# Altium PCB PWMSignalSplitter.PcbDoc
Units mil, origin at the board's own origin, x right, y up, seen from the top; angles counter-clockwise.
Board outline 1062.2 x 740 mil, 2 copper layers (Top Layer, Bottom Layer); 3 components, 3 nets, 7 pads, 0 vias.
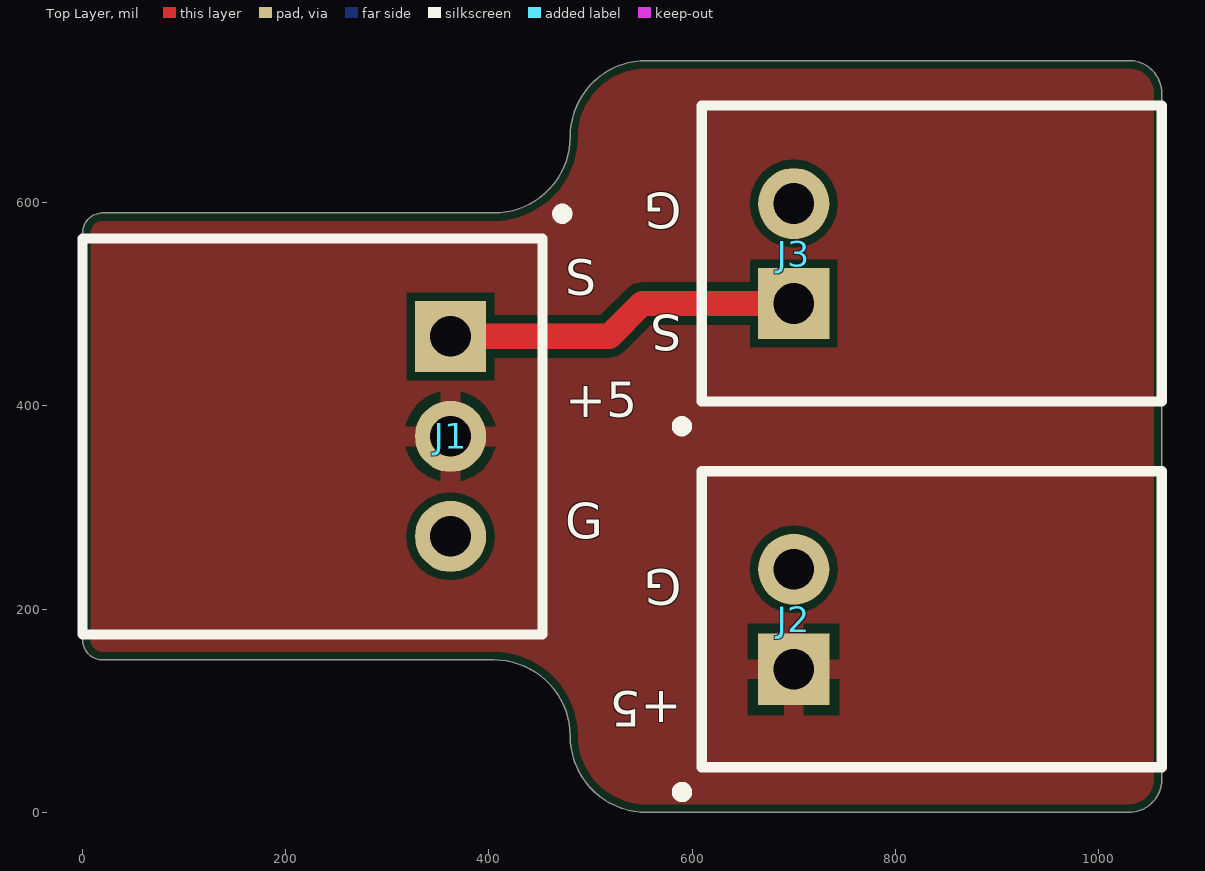
[diagram p0: Top Layer view]
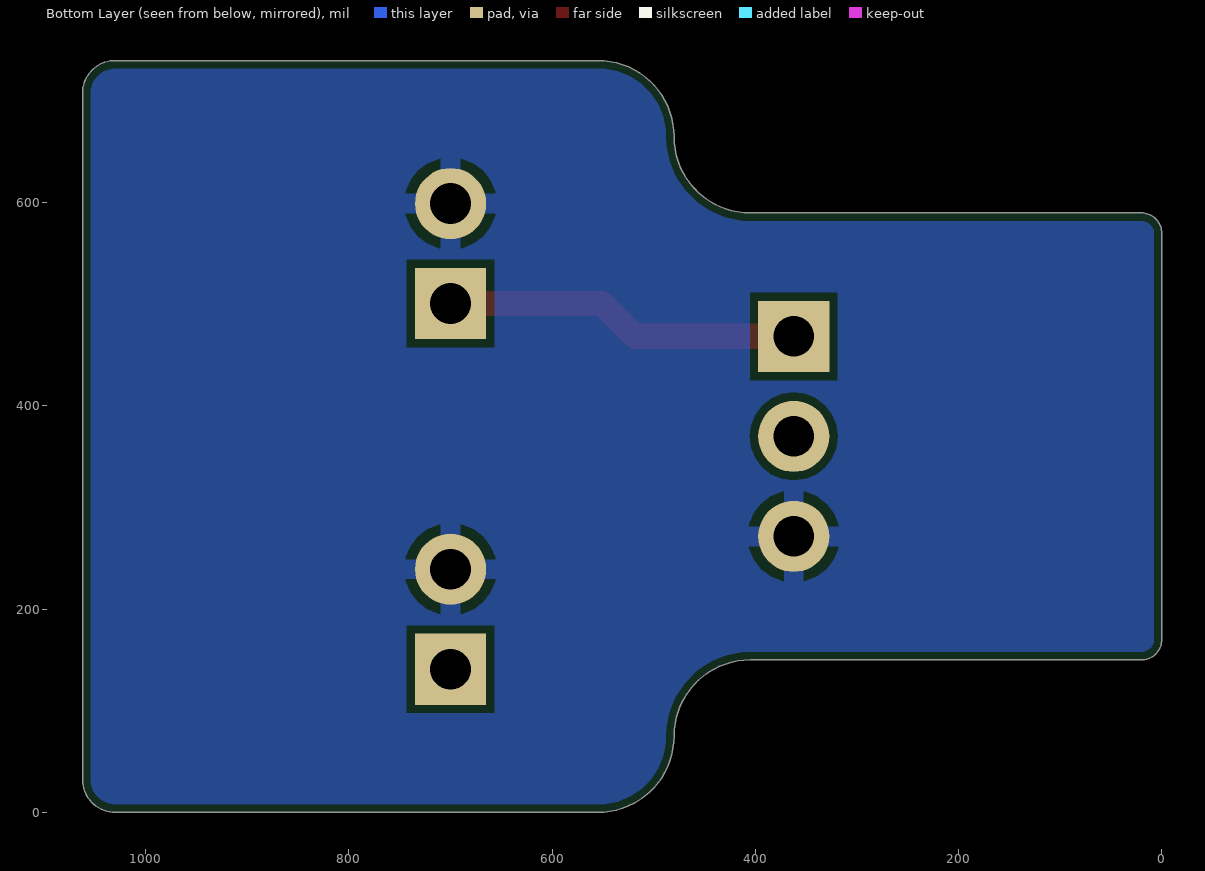
[diagram p1: Bottom Layer view, seen from below]
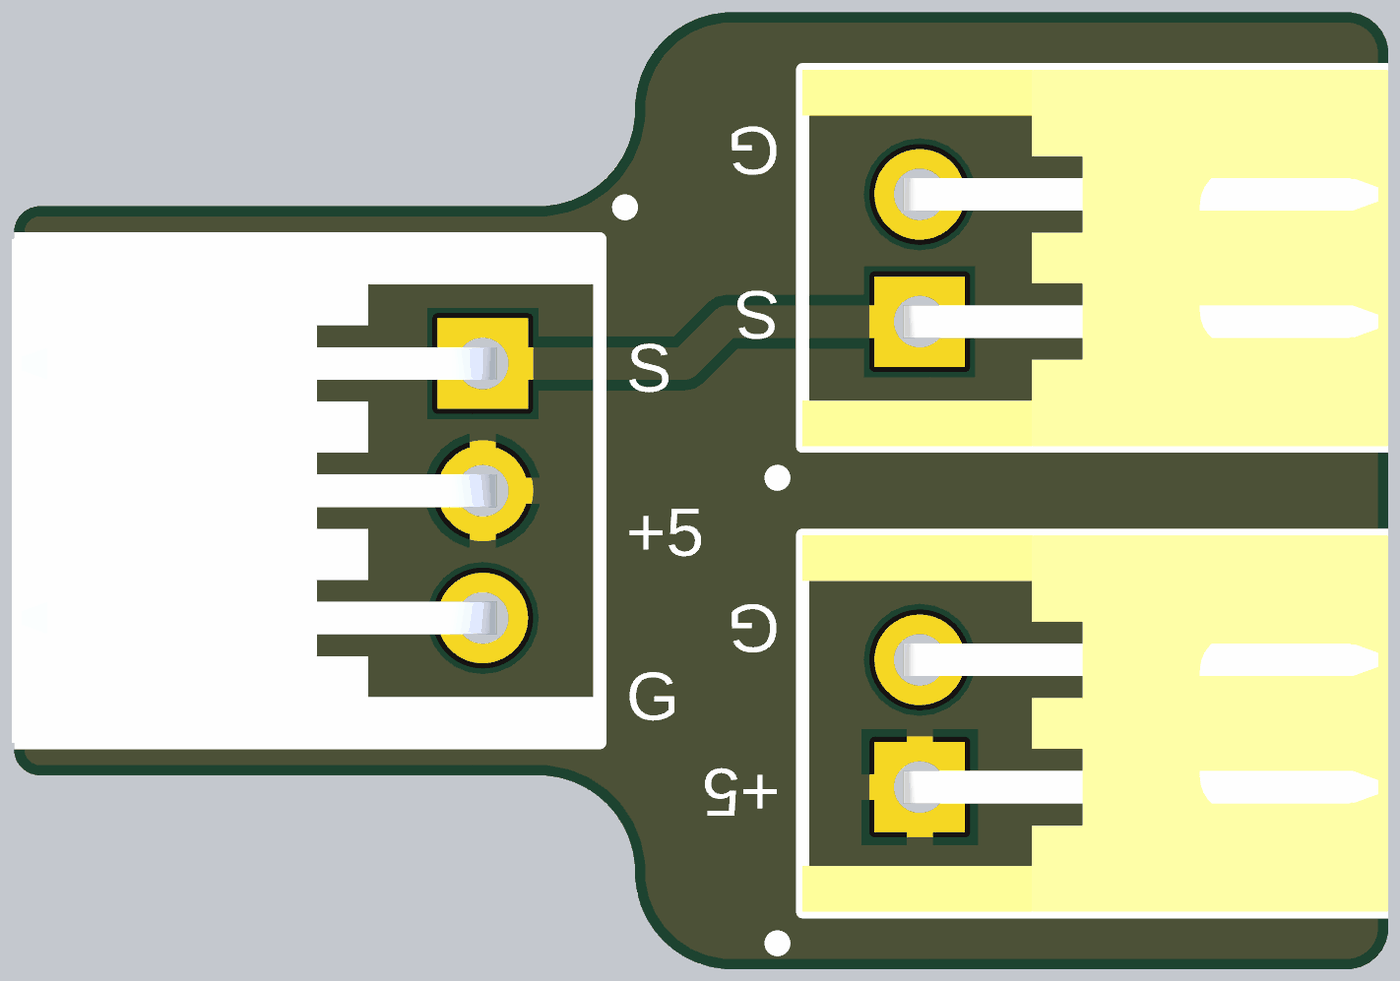
[diagram p2: 3D render of the assembled board from above, using the file's embedded part models]

## Layer stack, top to bottom
Top Solder: solder mask 0.4, Solder Resist, Dk 3.5
Top Layer: signal copper 1.4
Dielectric 1: dielectric 12.6, FR-4, Dk 4.8
Bottom Layer: signal copper 1.4
Bottom Solder: solder mask 0.4, Solder Resist, Dk 3.5

## Board outline
0,170 ccw(c20,170) 20,150 405,150 cw(c405,75) 480,75 ccw(c555,75) 555,0 1030,0 ccw(c1030,32.2) 1062.2,32.2 1062.2,707.8 ccw(c1030,707.8) 1030,740 555,740 ccw(c555,665) 480,665 cw(c405,665) 405,590 20,590 ccw(c20,570) 0,570

## Design rules (kind name [scope] priority, off if disabled: settings)
BoardOutlineClearance [All] p1: gap=7.87 ignorepadtopadclearanceinfootprint=FALSE except(15.75: Arc-SplitBarrior Arc-SplitContinuation Track-SplitBarrior Track-SplitContinuation SMDPad-SplitBarrior SMDPad-SplitContinuation THPad-SplitBarrior THPad-SplitContinuation Via-SplitBarrior Via-SplitContinuation Fill-SplitBarrior Fill-SplitContinuation Poly-SplitBarrior Poly-SplitContinuation Region-SplitBarrior Region-SplitContinuation Text-SplitBarrior Text-SplitContinuation)
Clearance "Clearance Bottom Layer" [OnLayer('Bottom Layer')] p1: gap=8 ignorepadtopadclearanceinfootprint=TRUE except(10: Arc-Text Track-Text SMDPad-Text THPad-Text Via-Text Fill-Text Poly-Text Region-Text Text-Text)
Clearance "Clearance Top Layer" [OnLayer('Top Layer')] p2: gap=8 ignorepadtopadclearanceinfootprint=TRUE except(10: Arc-Text Track-Text SMDPad-Text THPad-Text Via-Text Fill-Text Poly-Text Region-Text Text-Text)
Clearance [All] p3: gap=7.87 ignorepadtopadclearanceinfootprint=FALSE except(3.5: Arc-Arc Arc-Track Arc-SMDPad Track-Track Track-SMDPad SMDPad-SMDPad; 5: Arc-Via Track-Via SMDPad-Via THPad-Via Via-Via; 10: Arc-Text Track-Text SMDPad-Text THPad-Text Via-Text Fill-Text Poly-Text Region-Text Text-Text)
HoleSize [All] p1: absolutevalues=TRUE maxlimit=248.03 minlimit=7.87 maxpercent=80.000 minpercent=20.000
MinimumAnnularRing [All] p1: minimumring=3
MinimumSolderMaskSliver [All] p1: minsoldermaskwidth=3.94
PolygonConnect PolygonConnect_1 [All] p1: thpad.connectstyle=Relief thpad.reliefconductorwidth=20 thpad.reliefentries=4 thpad.polygonreliefangle="90 Angle" thpad.airgapwidth=10 smdpad.connectstyle=Relief smdpad.reliefconductorwidth=20 smdpad.reliefentries=4 smdpad.polygonreliefangle="90 Angle" smdpad.airgapwidth=10 via.connectstyle=Direct via.reliefconductorwidth=20 via.reliefentries=4 via.polygonreliefangle="90 Angle" via.airgapwidth=10
PolygonConnect [All] p2: connectstyle=Relief reliefconductorwidth=10 reliefentries=4 polygonreliefangle="90 Angle" airgapwidth=10
RoutingCorners [All] p1: cornerstyle=Round minsetback=100 maxsetback=100
RoutingVias [All] p1: holewidth=19.68 width=39.37 viastyle="Through Hole" minholewidth=7.87 minwidth=17.72 maxholewidth=39.37 maxwidth=78.74
SilkToSilkClearance [All] p1: silktosilkclearance=3.94
SilkToSolderMaskClearance [IsPad] p1: minsilkscreentomaskgap=3.94 clearancetoexposedcopper=TRUE
SolderMaskExpansion [All] p1: expansion=4 istentingtop=FALSE
Width [All] p1: maxlimit=100 minlimit=3.5 preferedwidth=15
24 further rules are at their usual default settings.

## Components (designator, comment, footprint, x,y, rotation, side; value= is the part's Value field where it differs from the comment)
J1 "JST-XH 3POS R/A" S3B-XH-A(LF)(SN) 362.2,370 r90 top
J2 "JST-XH 2POS R/A" S2B-XH-A(LF)(SN) 700,190 r270 top
J3 "JST-XH 2POS R/A" S2B-XH-A(LF)(SN) 700,550 r270 top

## Footprints (in the part's own frame and the unit in brackets; to place one, negate y for a bottom-side part, rotate by r counter-clockwise, add the part's x,y. Pads: shape width x height; smd on the part's side, far side on the other; paste and mask are expansions set on the pad)
S2B-XH-A(LF)(SN) [mil] "JST XH CONN HEADER R/A 2POS 2.5MM"
  rect 70x70 hole 40: 1(49.21,0)
  round 70 hole 40: 2(-49.21,0)
  silkscreen extent -146,-115 175,362, body extent -146,-91 146,362, height 242
S3B-XH-A(LF)(SN) [mil] "JST XH CONN HEADER R/A 3POS 2.5MM"
  rect 70x70 hole 40: 1(98.43,0)
  round 70 hole 40: 2(0,0) 3(-98.43,0)
  silkscreen extent -195,-115 224,362, body extent -195,-89 195,364, height 242

## Part data
J1: library part S3B-XH-A(LF)(SN), "JST XH CONN HEADER R/A 3POS 2.5MM", Manufacturer=JST, ComponentLink1Description=DigiKey, ComponentLink1URL=https://www.digikey.com/en/products/detail/jst-sales-america-inc/S2B-XH-A-LF-SN/1651055, Part Number=S3B-XH-A(LF)(SN)
J2 J3: library part S2B-XH-A(LF)(SN), "JST XH CONN HEADER R/A 2POS 2.5MM", Manufacturer=JST, ComponentLink1Description=DigiKey, ComponentLink1URL=https://www.digikey.com/en/products/detail/jst-sales-america-inc/S2B-XH-A-LF-SN/1651055, Part Number=S2B-XH-A(LF)(SN)

## Nets (pads, with @x,y where several pads share a name; then routed paths per layer and width w, separated by ;. In a path a pad name is that pad's centre, name@x,y a point inside that pad or via, vN(x,y) a via of type N, cw(c..) or ccw(c..) an arc to the next point about the centre after c; other vN are vias at no path point)
+5: J1.2 J2.1
GND: J1.3 J2.2 J3.2
Signal: J1.1 J3.1 | length 351.2
  Top Layer w25: J1.1 518.43,468.43 550.79,500.79 J3.1

## Polygon pours and split planes (outlines as drawn)
+5 on Top Layer "+5_L01_P000" (solid, pour order 0): 0.5,169.5 0.5,570.5 cw(c20,570.5) 20,590 405,590 ccw(c405,665) 480,665 cw(c555.5,665) 555.5,740.5 1030.5,740.5 cw(c1030.5,708.3) 1062.7,708.3 1062.7,32.7 cw(c1030.5,32.7) 1030.5,0.5 554.5,0.5 cw(c554.5,75) 480,75 ccw(c405,75) 405,150 20,150 cw(c20,169.5)
GND on Bottom Layer "GND_L02_P003" (solid, pour order 3): 0,169.5 0,570.5 cw(c19.5,570.5) 19.5,590 404.5,590 ccw(c404.5,665) 479.5,665 cw(c555,665) 555,740.5 1030,740.5 cw(c1030,708.3) 1062.2,708.3 1062.2,32.7 cw(c1030,32.7) 1030,0.5 554,0.5 cw(c554,75) 479.5,75 ccw(c404.5,75) 404.5,150 19.5,150 cw(c19.5,169.5)

## Silkscreen, mask and mechanical layers (free items; w line width, h text height)
Top Overlay:
  text "S /  / G" at 590,621.56 h60 r180
  text "S /  / +5 /  / G" at 475,257.3 h60
  text "+5 /  / G" at 590,250.98 h60 r180
Mechanical 1:
  the board outline again, w10